# Altium PCB RX_Board.PcbDoc (part 2 of 5)
Units mm, origin at the board's own origin, x right, y up, seen from the top; angles counter-clockwise.
Board outline 69 x 69 mm, 4 copper layers (Top Layer, Int1 (GND), Int2 (GND), Bottom Layer), stack 1.586 mm thick; 118 components, 59 nets, 325 pads, 477 vias.
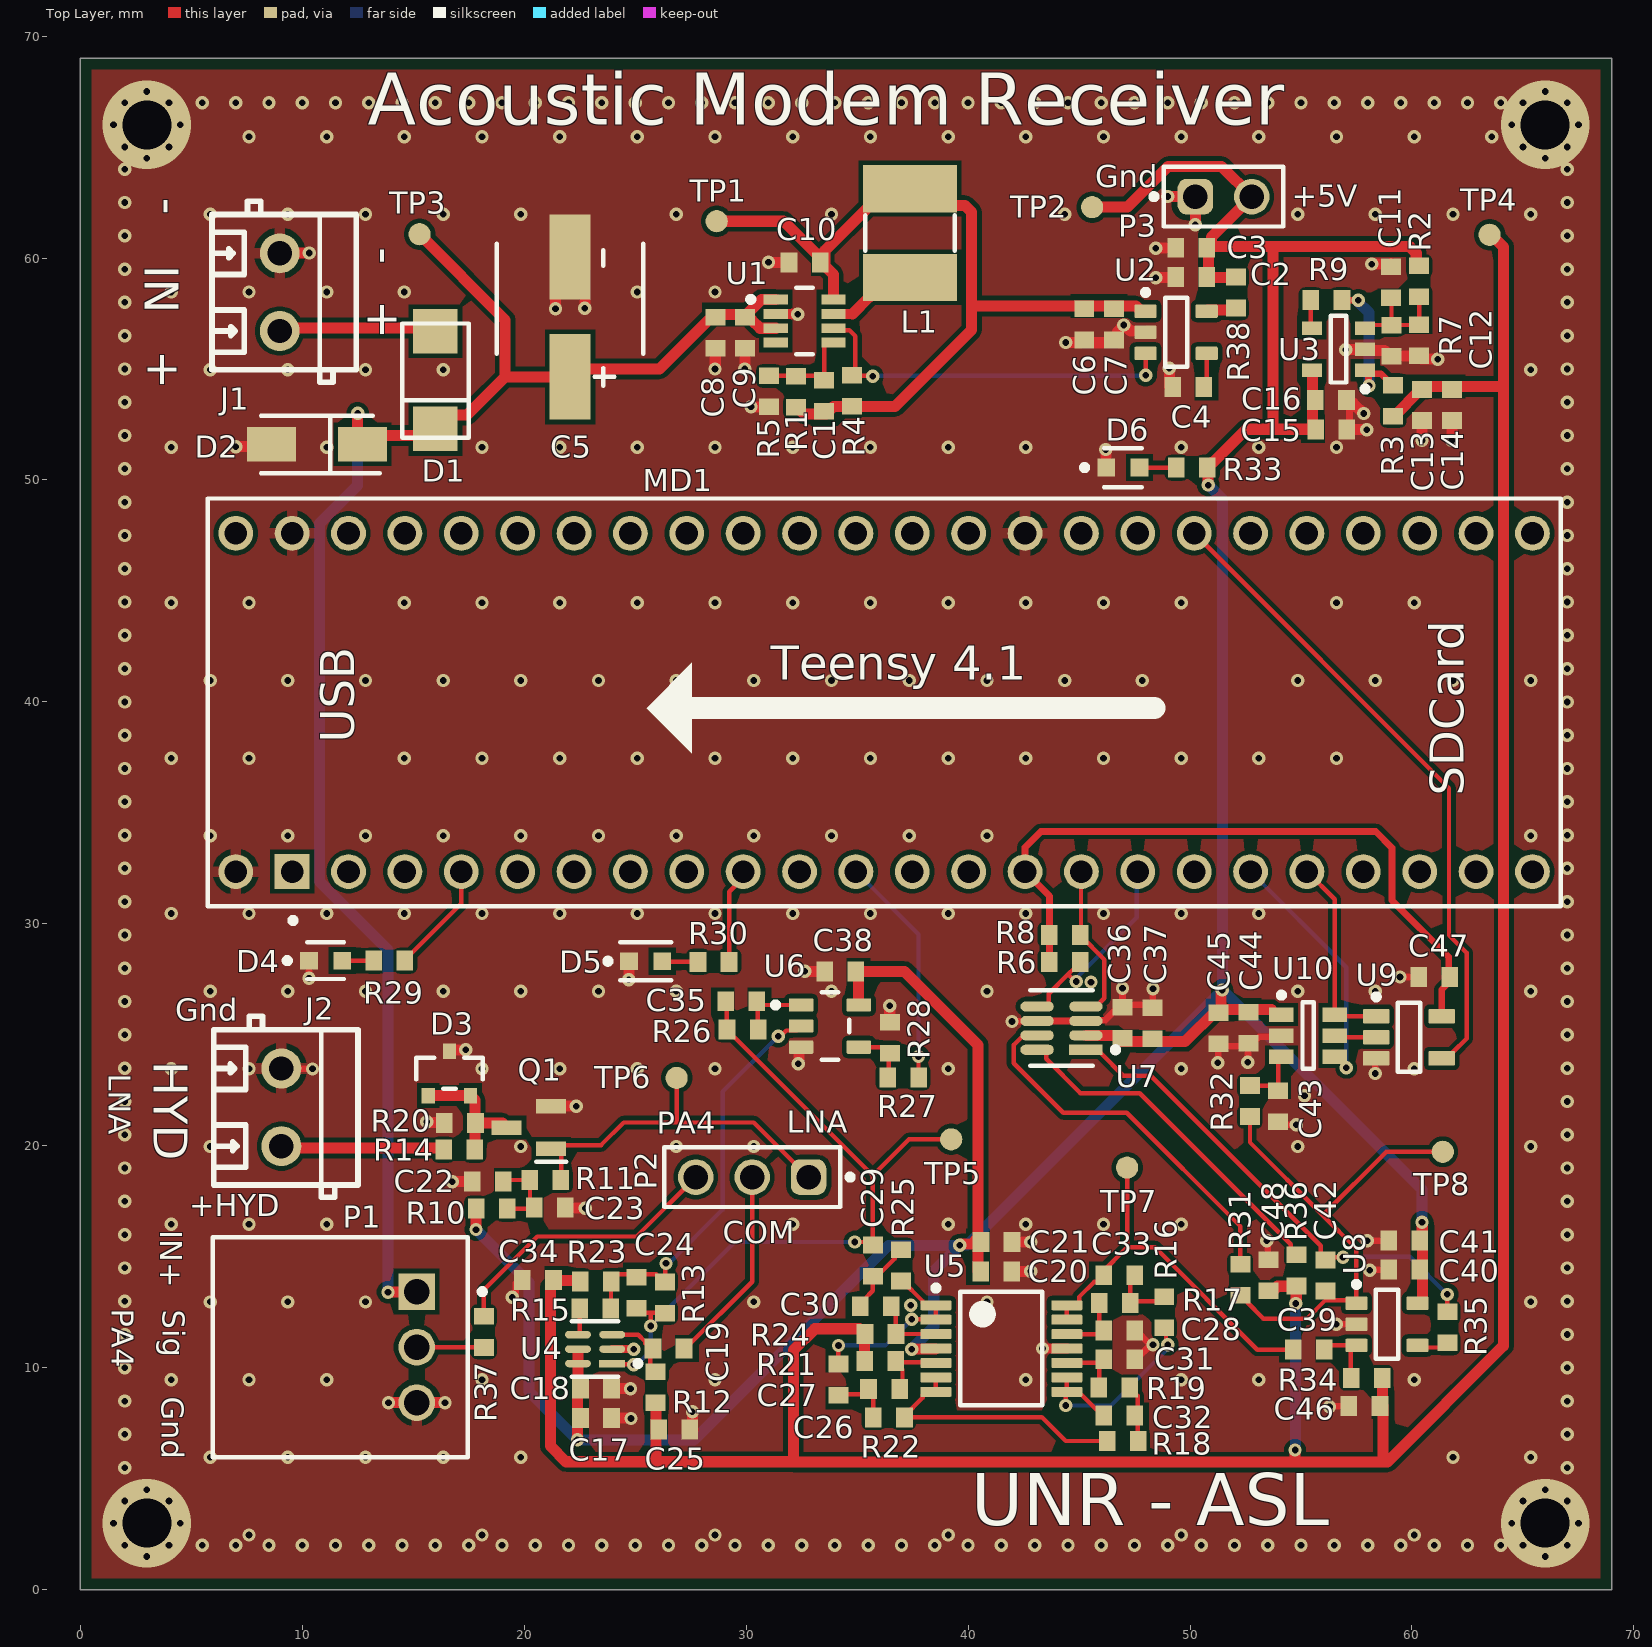
[diagram p0: Top Layer view]

## Part data (continued)
C24: library part CC0603CRNPO9BN6R8, "Surface Mount Ceramic Multilayer Capacitor 6.8pF 0.25pF C0G 50V 0603 Paper T/R", Case Code (Imperial)=0603, Case Code (Metric)=1608, Dielectric=C0G, Dielectric Material=Ceramic, JLCPCB Part Number=C282251, Manufacturer="Yageo Group", Max Operating Temperature=125°C, Min Operating Temperature=-55°C, Temperature Coefficient=30ppm/°C, Voltage=50V, Case/Package=0603, Category="Ceramic Capacitors", China RoHS=Compliant, ComponentLink1Description=https://datasheet.octopart.com:443/CC0603CRNPO9BN6R8-Yageo-datasheet-182140217.pdf?src-supplier=IHS, ComponentLink1URL=https://datasheet.octopart.com:443/CC0603CRNPO9BN6R8-Yageo-datasheet-182140217.pdf?src-supplier=IHS, ComponentLink2Description=https://datasheet.octopart.com:443/CC0603CRNPO9BN6R8-Yageo-datasheet-182029515.pdf?src-supplier=Farnell, ComponentLink2URL=https://datasheet.octopart.com:443/CC0603CRNPO9BN6R8-Yageo-datasheet-182029515.pdf?src-supplier=Farnell, ComponentLink3Description=https://datasheet.octopart.com:443/CC0603CRNPO9BN6R8-Yageo-datasheet-151948684.pdf?src-supplier=element14+APAC, ComponentLink3URL=https://datasheet.octopart.com:443/CC0603CRNPO9BN6R8-Yageo-datasheet-151948684.pdf?src-supplier=element14+APAC, ComponentLink4Description=https://datasheet.octopart.com:443/CC0603CRNPO9BN6R8-Yageo-Group-datasheet-189192896.pdf?src-supplier=TME, ComponentLink4URL=https://datasheet.octopart.com:443/CC0603CRNPO9BN6R8-Yageo-Group-datasheet-189192896.pdf?src-supplier=TME, ComponentLink5Description=https://datasheet.octopart.com:443/CC0603CRNPO9BN6R8-Yageo-Group-datasheet-188129580.pdf?src-supplier=LCSC, ComponentLink5URL=https://datasheet.octopart.com:443/CC0603CRNPO9BN6R8-Yageo-Group-datasheet-188129580.pdf?src-supplier=LCSC, ComponentLink6Description=https://datasheet.octopart.com:443/CC0603CRNPO9BN6R8-Yageo-datasheet-137875056.pdf?src-supplier=Future+Electronics, ComponentLink6URL=https://datasheet.octopart.com:443/CC0603CRNPO9BN6R8-Yageo-datasheet-137875056.pdf?src-supplier=Future+Electronics, ComponentLink7Description=https://datasheet.octopart.com:443/CC0603CRNPO9BN6R8-Yageo-datasheet-136957424.pdf?src-supplier=Future+Electronics, ComponentLink7URL=https://datasheet.octopart.com:443/CC0603CRNPO9BN6R8-Yageo-datasheet-136957424.pdf?src-supplier=Future+Electronics, ComponentLink8Description=https://datasheet.octopart.com:443/CC0603CRNPO9BN6R8-Yageo-datasheet-137700082.pdf?src-supplier=Future+Electronics, ComponentLink8URL=https://datasheet.octopart.com:443/CC0603CRNPO9BN6R8-Yageo-datasheet-137700082.pdf?src-supplier=Future+Electronics, ComponentLink9Description=https://datasheet.octopart.com:443/CC0603CRNPO9BN6R8-Yageo-datasheet-78855684.pdf?src-supplier=Future+Electronics, ComponentLink9URL=https://datasheet.octopart.com:443/CC0603CRNPO9BN6R8-Yageo-datasheet-78855684.pdf?src-supplier=Future+Electronics, ComponentLink10Description=https://datasheet.octopart.com:443/CC0603CRNPO9BN6R8-Yageo-datasheet-16730043.pdf?src-supplier=Future+Electronics, ComponentLink10URL=https://datasheet.octopart.com:443/CC0603CRNPO9BN6R8-Yageo-datasheet-16730043.pdf?src-supplier=Future+Electronics, ComponentLink11Description=https://datasheet.octopart.com:443/CC0603CRNPO9BN6R8-Yageo-datasheet-12589826.pdf?src-supplier=Future+Electronics, ComponentLink11URL=https://datasheet.octopart.com:443/CC0603CRNPO9BN6R8-Yageo-datasheet-12589826.pdf?src-supplier=Future+Electronics, ComponentLink12Description=https://datasheet.octopart.com:443/CC0603CRNPO9BN6R8-Yageo-datasheet-10406438.pdf?src-supplier=Future+Electronics, ComponentLink12URL=https://datasheet.octopart.com:443/CC0603CRNPO9BN6R8-Yageo-datasheet-10406438.pdf?src-supplier=Future+Electronics, ComponentLink13Description=https://datasheet.octopart.com:443/CC0603CRNPO9BN6R8-Yageo-datasheet-8817079.pdf?src-supplier=Future+Electronics, ComponentLink13URL=https://datasheet.octopart.com:443/CC0603CRNPO9BN6R8-Yageo-datasheet-8817079.pdf?src-supplier=Future+Electronics, ComponentLink14Description=https://datasheet.octopart.com:443/CC0603CRNPO9BN6R8-Yageo-datasheet-8324240.pdf?src-supplier=Future+Electronics, ComponentLink14URL=https://datasheet.octopart.com:443/CC0603CRNPO9BN6R8-Yageo-datasheet-8324240.pdf?src-supplier=Future+Electronics, ComponentLink15Description=https://datasheet.octopart.com:443/CC0603CRNPO9BN6R8-Yageo-datasheet-504625.pdf?src-supplier=Future+Electronics, ComponentLink15URL=https://datasheet.octopart.com:443/CC0603CRNPO9BN6R8-Yageo-datasheet-504625.pdf?src-supplier=Future+Electronics, ComponentLink16Description=https://datasheet.octopart.com:443/CC0603CRNPO9BN6R8-Yageo-datasheet-5321569.pdf?src-supplier=Future+Electronics, ComponentLink16URL=https://datasheet.octopart.com:443/CC0603CRNPO9BN6R8-Yageo-datasheet-5321569.pdf?src-supplier=Future+Electronics, ComponentLink17Description=https://datasheet.octopart.com:443/CC0603CRNPO9BN6R8-Yageo-datasheet-8643175.pdf?src-supplier=SOS+electronic, ComponentLink17URL=https://datasheet.octopart.com:443/CC0603CRNPO9BN6R8-Yageo-datasheet-8643175.pdf?src-supplier=SOS+electronic, ComponentLink18Description=http://sigma.octopart.com:80/conflict_mineral_statement/Yageo-company-3.pdf?src-supplier=Compliance+Statements, ComponentLink18URL=http://sigma.octopart.com:80/conflict_mineral_statement/Yageo-company-3.pdf?src-supplier=Compliance+Statements, ComponentLink19Description=http://sigma.octopart.com:80/rohs_statement/Yageo-company-2.pdf?src-supplier=Compliance+Statements, ComponentLink19URL=http://sigma.octopart.com:80/rohs_statement/Yageo-company-2.pdf?src-supplier=Compliance+Statements, Composition=Ceramic, Country of Origin="Mainland China, Taiwan", Depth=800µm, Export Control Classification Number (ECCN) Code=EAR99, Halogen Free="Halogen Free", Harmonized Tariff Schedule (HTS) Code=8532.24.00.20, Height=800µm, Introduction Date=2003-08-13, Lead Free="Lead Free", Length=1.6mm, Lifecycle Status=Production, Manufacturer Part Number=CC0603CRNPO9BN6R8, Mounting Technology="Surface Mount", Number of Terminals=2, Packaging="Tape and Reel", Pricing="10=0.041, 20=0.04, 30=0.038, 50=0.037, 100=0.035, 250=0.031, 500=0.026, 1000=0.025 (USD)", Radiation Hardening=No, REACH SVHC=Unaffected, RoHS=Compliant, Schedule B="8532240020, 8532240020|8532240020|8532240020|8532240020|8532240020", Stock=9772, Supplier=Newark, Supplier Part Number=CC0603CRNPO9BN6R8, Termination=SMD/SMT, Thickness=889µm, Voltage Rating=50V, Voltage Rating (DC)=50V, Weight=2.012816mg, Width=800µm
C26 C27 C29 C30 C31: library part CC0603JRNPO9BN102, "50V 1nF NP0 ±5% 0603 Multilayer Ceramic Capacitors MLCC - SMD/SMT ROHS", Case Code (Imperial)=0603, Case Code (Metric)=1608, Dielectric=C0G, Dielectric Material=Ceramic, JLCPCB Part Number=C106246, Manufacturer="Yageo Group", Max Operating Temperature=125°C, Min Operating Temperature=-55°C, Temperature Coefficient=30ppm/°C, Tolerance=5%, Voltage=50V, Case/Package=0603, Category="Ceramic Capacitors", China RoHS=Compliant, ComponentLink1Description=https://datasheet.octopart.com:443/CC0603JRNPO9BN102-Yageo-datasheet-182140217.pdf?src-supplier=IHS, ComponentLink1URL=https://datasheet.octopart.com:443/CC0603JRNPO9BN102-Yageo-datasheet-182140217.pdf?src-supplier=IHS, ComponentLink2Description=https://datasheet.octopart.com:443/CC0603JRNPO9BN102-Yageo-datasheet-137875056.pdf?src-supplier=Future+Electronics, ComponentLink2URL=https://datasheet.octopart.com:443/CC0603JRNPO9BN102-Yageo-datasheet-137875056.pdf?src-supplier=Future+Electronics, ComponentLink3Description=https://datasheet.octopart.com:443/CC0603JRNPO9BN102-Yageo-datasheet-136957424.pdf?src-supplier=Future+Electronics, ComponentLink3URL=https://datasheet.octopart.com:443/CC0603JRNPO9BN102-Yageo-datasheet-136957424.pdf?src-supplier=Future+Electronics, ComponentLink4Description=https://datasheet.octopart.com:443/CC0603JRNPO9BN102-Yageo-datasheet-137700082.pdf?src-supplier=Future+Electronics, ComponentLink4URL=https://datasheet.octopart.com:443/CC0603JRNPO9BN102-Yageo-datasheet-137700082.pdf?src-supplier=Future+Electronics, ComponentLink5Description=https://datasheet.octopart.com:443/CC0603JRNPO9BN102-Yageo-datasheet-78855684.pdf?src-supplier=Future+Electronics, ComponentLink5URL=https://datasheet.octopart.com:443/CC0603JRNPO9BN102-Yageo-datasheet-78855684.pdf?src-supplier=Future+Electronics, ComponentLink6Description=https://datasheet.octopart.com:443/CC0603JRNPO9BN102-Yageo-datasheet-16730043.pdf?src-supplier=Future+Electronics, ComponentLink6URL=https://datasheet.octopart.com:443/CC0603JRNPO9BN102-Yageo-datasheet-16730043.pdf?src-supplier=Future+Electronics, ComponentLink7Description=https://datasheet.octopart.com:443/CC0603JRNPO9BN102-Yageo-datasheet-12589826.pdf?src-supplier=Future+Electronics, ComponentLink7URL=https://datasheet.octopart.com:443/CC0603JRNPO9BN102-Yageo-datasheet-12589826.pdf?src-supplier=Future+Electronics, ComponentLink8Description=https://sigma.octopart.com:443/147830939/technical_drawing/Yageo-CC0603JRNPO9BN102.pdf?src-supplier=Upverter, ComponentLink8URL=https://sigma.octopart.com:443/147830939/technical_drawing/Yageo-CC0603JRNPO9BN102.pdf?src-supplier=Upverter, ComponentLink9Description=https://datasheet.octopart.com:443/CC0603JRNPO9BN102-Yageo-datasheet-10406438.pdf?src-supplier=element14+APAC, ComponentLink9URL=https://datasheet.octopart.com:443/CC0603JRNPO9BN102-Yageo-datasheet-10406438.pdf?src-supplier=element14+APAC, ComponentLink10Description=https://datasheet.octopart.com:443/CC0603JRNPO9BN102-Yageo-datasheet-67645495.pdf?src-supplier=element14+APAC, ComponentLink10URL=https://datasheet.octopart.com:443/CC0603JRNPO9BN102-Yageo-datasheet-67645495.pdf?src-supplier=element14+APAC, ComponentLink11Description=https://datasheet.octopart.com:443/CC0603JRNPO9BN102-Yageo-datasheet-10882999.pdf?src-supplier=element14+APAC, ComponentLink11URL=https://datasheet.octopart.com:443/CC0603JRNPO9BN102-Yageo-datasheet-10882999.pdf?src-supplier=element14+APAC, ComponentLink12Description=https://datasheet.octopart.com:443/CC0603JRNPO9BN102-Yageo-datasheet-151948684.pdf?src-supplier=Newark, ComponentLink12URL=https://datasheet.octopart.com:443/CC0603JRNPO9BN102-Yageo-datasheet-151948684.pdf?src-supplier=Newark, ComponentLink13Description=https://datasheet.octopart.com:443/CC0603JRNPO9BN102-Yageo-datasheet-181968167.pdf?src-supplier=Newark, ComponentLink13URL=https://datasheet.octopart.com:443/CC0603JRNPO9BN102-Yageo-datasheet-181968167.pdf?src-supplier=Newark, ComponentLink14Description=https://datasheet.octopart.com:443/CC0603JRNPO9BN102-Yageo-datasheet-181968166.pdf?src-supplier=Newark, ComponentLink14URL=https://datasheet.octopart.com:443/CC0603JRNPO9BN102-Yageo-datasheet-181968166.pdf?src-supplier=Newark, ComponentLink15Description=https://datasheet.octopart.com:443/CC0603JRNPO9BN102-Yageo-datasheet-65873193.pdf?src-supplier=Farnell, ComponentLink15URL=https://datasheet.octopart.com:443/CC0603JRNPO9BN102-Yageo-datasheet-65873193.pdf?src-supplier=Farnell, ComponentLink16Description=https://datasheet.octopart.com:443/CC0603JRNPO9BN102-Yageo-datasheet-8817079.pdf?src-supplier=element14, ComponentLink16URL=https://datasheet.octopart.com:443/CC0603JRNPO9BN102-Yageo-datasheet-8817079.pdf?src-supplier=element14, ComponentLink17Description=https://datasheet.octopart.com:443/CC0603JRNPO9BN102-Yageo-datasheet-8324240.pdf?src-supplier=element14, ComponentLink17URL=https://datasheet.octopart.com:443/CC0603JRNPO9BN102-Yageo-datasheet-8324240.pdf?src-supplier=element14, ComponentLink18Description=https://datasheet.octopart.com:443/CC0603JRNPO9BN102-Yageo-datasheet-504625.pdf?src-supplier=element14, ComponentLink18URL=https://datasheet.octopart.com:443/CC0603JRNPO9BN102-Yageo-datasheet-504625.pdf?src-supplier=element14, ComponentLink19Description=https://datasheet.octopart.com:443/CC0603JRNPO9BN102-Yageo-datasheet-5321569.pdf?src-supplier=element14, ComponentLink19URL=https://datasheet.octopart.com:443/CC0603JRNPO9BN102-Yageo-datasheet-5321569.pdf?src-supplier=element14, ComponentLink20Description=https://datasheet.octopart.com:443/CC0603JRNPO9BN102-Yageo-Group-datasheet-188129580.pdf?src-supplier=LCSC, ComponentLink20URL=https://datasheet.octopart.com:443/CC0603JRNPO9BN102-Yageo-Group-datasheet-188129580.pdf?src-supplier=LCSC, ComponentLink21Description=https://datasheet.octopart.com:443/CC0603JRNPO9BN102-Yageo-datasheet-8555986.pdf?src-supplier=TME, ComponentLink21URL=https://datasheet.octopart.com:443/CC0603JRNPO9BN102-Yageo-datasheet-8555986.pdf?src-supplier=TME, ComponentLink22Description=https://datasheet.octopart.com:443/CC0603JRNPO9BN102-Yageo-datasheet-68296204.pdf?src-supplier=Megastar, ComponentLink22URL=https://datasheet.octopart.com:443/CC0603JRNPO9BN102-Yageo-datasheet-68296204.pdf?src-supplier=Megastar, ComponentLink23Description=http://sigma.octopart.com:80/conflict_mineral_statement/Yageo-company-3.pdf?src-supplier=Compliance+Statements, ComponentLink23URL=http://sigma.octopart.com:80/conflict_mineral_statement/Yageo-company-3.pdf?src-supplier=Compliance+Statements, ComponentLink24Description=http://sigma.octopart.com:80/rohs_statement/Yageo-company-2.pdf?src-supplier=Compliance+Statements, ComponentLink24URL=http://sigma.octopart.com:80/rohs_statement/Yageo-company-2.pdf?src-supplier=Compliance+Statements, Composition=Ceramic, Country of Origin="Mainland China, Taiwan", Depth=800µm, Export Control Classification Number (ECCN) Code=EAR99, Halogen Free="Halogen Free", Harmonized Tariff Schedule (HTS) Code=8532.24.00.20, Height=800µm, Introduction Date=2009-04-16, Lead Free="Lead Free", Length=1.6mm, Lifecycle Status=Production, Manufacturer Part Number=CC0603JRNPO9BN102, Material=Ceramic, Mounting Technology="Surface Mount", Number of Terminals=2, Packaging=Digi-Reel®, Pins=2, Pricing="4000=0.02, 12000=0.019, 20000=0.018 (USD)", Radiation Hardening=No, REACH SVHC=Unaffected, RoHS=Compliant, Schedule B="8532240020, 8532240020|8532240020, 8532240020|8532240020|8532240020, 8532240020|8532240020|8532240020|8532240020", Stock=4000, Supplier=Avnet, Supplier Part Number=CC0603JRNPO9BN102, Termination=SMD/SMT, Thickness=889µm, Voltage Rating=50V, Voltage Rating (DC)=50V, Width=800µm
C28: library part CC0603FRNPO9BN471, "50V 470pF NP0 ±1% 0603 Multilayer Ceramic Capacitors MLCC - SMD/SMT ROHS", Case Code (Imperial)=0603, Case Code (Metric)=1608, Dielectric=C0G, Dielectric Material=Ceramic, Insulation Resistance=10GΩ, JLCPCB Part Number=C519564, Manufacturer="Yageo Group", Max Operating Temperature=125°C, Min Operating Temperature=-55°C, Tolerance=1%, Voltage Rating=50V, Case/Package=0603, Category="Ceramic Capacitors", China RoHS=Compliant, ComponentLink1Description=https://datasheet.octopart.com:443/CC0603FRNPO9BN471-Yageo-datasheet-182140217.pdf?src-supplier=IHS, ComponentLink1URL=https://datasheet.octopart.com:443/CC0603FRNPO9BN471-Yageo-datasheet-182140217.pdf?src-supplier=IHS, ComponentLink2Description=https://datasheet.octopart.com:443/CC0603FRNPO9BN471-Yageo-datasheet-151948684.pdf?src-supplier=HQonline, ComponentLink2URL=https://datasheet.octopart.com:443/CC0603FRNPO9BN471-Yageo-datasheet-151948684.pdf?src-supplier=HQonline, ComponentLink3Description=https://datasheet.octopart.com:443/CC0603FRNPO9BN471-Yageo-datasheet-182029577.pdf?src-supplier=Newark, ComponentLink3URL=https://datasheet.octopart.com:443/CC0603FRNPO9BN471-Yageo-datasheet-182029577.pdf?src-supplier=Newark, ComponentLink4Description=https://datasheet.octopart.com:443/CC0603FRNPO9BN471-Yageo-datasheet-182029576.pdf?src-supplier=Newark, ComponentLink4URL=https://datasheet.octopart.com:443/CC0603FRNPO9BN471-Yageo-datasheet-182029576.pdf?src-supplier=Newark, ComponentLink5Description=https://datasheet.octopart.com:443/CC0603FRNPO9BN471-Yageo-Group-datasheet-188129580.pdf?src-supplier=LCSC, ComponentLink5URL=https://datasheet.octopart.com:443/CC0603FRNPO9BN471-Yageo-Group-datasheet-188129580.pdf?src-supplier=LCSC, ComponentLink6Description=https://datasheet.octopart.com:443/CC0603FRNPO9BN471-Yageo-datasheet-137875056.pdf?src-supplier=Future+Electronics, ComponentLink6URL=https://datasheet.octopart.com:443/CC0603FRNPO9BN471-Yageo-datasheet-137875056.pdf?src-supplier=Future+Electronics, ComponentLink7Description=https://datasheet.octopart.com:443/CC0603FRNPO9BN471-Yageo-datasheet-136957424.pdf?src-supplier=Future+Electronics, ComponentLink7URL=https://datasheet.octopart.com:443/CC0603FRNPO9BN471-Yageo-datasheet-136957424.pdf?src-supplier=Future+Electronics, ComponentLink8Description=https://datasheet.octopart.com:443/CC0603FRNPO9BN471-Yageo-datasheet-137700082.pdf?src-supplier=Future+Electronics, ComponentLink8URL=https://datasheet.octopart.com:443/CC0603FRNPO9BN471-Yageo-datasheet-137700082.pdf?src-supplier=Future+Electronics, ComponentLink9Description=https://datasheet.octopart.com:443/CC0603FRNPO9BN471-Yageo-datasheet-78855684.pdf?src-supplier=Future+Electronics, ComponentLink9URL=https://datasheet.octopart.com:443/CC0603FRNPO9BN471-Yageo-datasheet-78855684.pdf?src-supplier=Future+Electronics, ComponentLink10Description=https://datasheet.octopart.com:443/CC0603FRNPO9BN471-Yageo-datasheet-16730043.pdf?src-supplier=Future+Electronics, ComponentLink10URL=https://datasheet.octopart.com:443/CC0603FRNPO9BN471-Yageo-datasheet-16730043.pdf?src-supplier=Future+Electronics, ComponentLink11Description=https://datasheet.octopart.com:443/CC0603FRNPO9BN471-Yageo-datasheet-15895757.pdf?src-supplier=Future+Electronics, ComponentLink11URL=https://datasheet.octopart.com:443/CC0603FRNPO9BN471-Yageo-datasheet-15895757.pdf?src-supplier=Future+Electronics, ComponentLink12Description=https://datasheet.octopart.com:443/CC0603FRNPO9BN471-Yageo-datasheet-12589826.pdf?src-supplier=Future+Electronics, ComponentLink12URL=https://datasheet.octopart.com:443/CC0603FRNPO9BN471-Yageo-datasheet-12589826.pdf?src-supplier=Future+Electronics, ComponentLink13Description=https://datasheet.octopart.com:443/CC0603FRNPO9BN471-Yageo-datasheet-10406438.pdf?src-supplier=Future+Electronics, ComponentLink13URL=https://datasheet.octopart.com:443/CC0603FRNPO9BN471-Yageo-datasheet-10406438.pdf?src-supplier=Future+Electronics, ComponentLink14Description=http://sigma.octopart.com:80/conflict_mineral_statement/Yageo-company-3.pdf?src-supplier=Compliance+Statements, ComponentLink14URL=http://sigma.octopart.com:80/conflict_mineral_statement/Yageo-company-3.pdf?src-supplier=Compliance+Statements, ComponentLink15Description=http://sigma.octopart.com:80/rohs_statement/Yageo-company-2.pdf?src-supplier=Compliance+Statements, ComponentLink15URL=http://sigma.octopart.com:80/rohs_statement/Yageo-company-2.pdf?src-supplier=Compliance+Statements, Composition=Ceramic, Depth=800µm, Dissipation Factor=0.1%, Halogen Free="Halogen Free", Height=800µm, Lead Free="Lead Free", Length=1.6mm, Lifecycle Status=Production, Manufacturer Part Number=CC0603FRNPO9BN471, Mounting Technology="Surface Mount", Number of Terminals=2, Packaging="Tape and Reel", Pricing="1=0.0986, 11=0.0703, 101=0.0582, 501=0.0554, 1001=0.0547 (USD)", Radiation Hardening=No, REACH SVHC=Unaffected, RoHS=Compliant, Schedule B="8532240020, 8532240020|8532240020, 8532240020|8532240020|8532240020, 8532240020|8532240020|8532240020|8532240020", Stock=7080, Supplier=Newark, Supplier Part Number=CC0603FRNPO9BN471, Termination=SMD/SMT, Thickness=889µm, Voltage Rating (DC)=50V, Width=800µm
C32: library part CC0603JRNPO9BN122, "50V 1.2nF NP0 ±5% 0603 Multilayer Ceramic Capacitors MLCC - SMD/SMT ROHS", Case/Package=0603, Dielectric Material=Ceramic, JLCPCB Part Number=C576816, Manufacturer="Yageo Group", Max Operating Temperature=125°C, Min Operating Temperature=-55°C, Tolerance=5%, Voltage Rating=50V, Category="Ceramic Capacitors", China RoHS=Compliant, ComponentLink1Description=https://datasheet.octopart.com:443/CC0603JRNPO9BN122-Yageo-datasheet-182140217.pdf?src-supplier=IHS, ComponentLink1URL=https://datasheet.octopart.com:443/CC0603JRNPO9BN122-Yageo-datasheet-182140217.pdf?src-supplier=IHS, ComponentLink2Description=https://datasheet.octopart.com:443/CC0603JRNPO9BN122-Yageo-datasheet-182029623.pdf?src-supplier=Farnell, ComponentLink2URL=https://datasheet.octopart.com:443/CC0603JRNPO9BN122-Yageo-datasheet-182029623.pdf?src-supplier=Farnell, ComponentLink3Description=https://datasheet.octopart.com:443/CC0603JRNPO9BN122-Yageo-Group-datasheet-188129580.pdf?src-supplier=LCSC, ComponentLink3URL=https://datasheet.octopart.com:443/CC0603JRNPO9BN122-Yageo-Group-datasheet-188129580.pdf?src-supplier=LCSC, ComponentLink4Description=https://datasheet.octopart.com:443/CC0603JRNPO9BN122-Yageo-datasheet-137875056.pdf?src-supplier=Future+Electronics, ComponentLink4URL=https://datasheet.octopart.com:443/CC0603JRNPO9BN122-Yageo-datasheet-137875056.pdf?src-supplier=Future+Electronics, ComponentLink5Description=https://datasheet.octopart.com:443/CC0603JRNPO9BN122-Yageo-datasheet-136957424.pdf?src-supplier=Future+Electronics, ComponentLink5URL=https://datasheet.octopart.com:443/CC0603JRNPO9BN122-Yageo-datasheet-136957424.pdf?src-supplier=Future+Electronics, ComponentLink6Description=https://datasheet.octopart.com:443/CC0603JRNPO9BN122-Yageo-datasheet-137700082.pdf?src-supplier=Future+Electronics, ComponentLink6URL=https://datasheet.octopart.com:443/CC0603JRNPO9BN122-Yageo-datasheet-137700082.pdf?src-supplier=Future+Electronics, ComponentLink7Description=https://datasheet.octopart.com:443/CC0603JRNPO9BN122-Yageo-datasheet-78855684.pdf?src-supplier=Future+Electronics, ComponentLink7URL=https://datasheet.octopart.com:443/CC0603JRNPO9BN122-Yageo-datasheet-78855684.pdf?src-supplier=Future+Electronics, ComponentLink8Description=https://datasheet.octopart.com:443/CC0603JRNPO9BN122-Yageo-datasheet-62126864.pdf?src-supplier=Future+Electronics, ComponentLink8URL=https://datasheet.octopart.com:443/CC0603JRNPO9BN122-Yageo-datasheet-62126864.pdf?src-supplier=Future+Electronics, ComponentLink9Description=https://datasheet.octopart.com:443/CC0603JRNPO9BN122-Yageo-datasheet-62091628.pdf?src-supplier=Future+Electronics, ComponentLink9URL=https://datasheet.octopart.com:443/CC0603JRNPO9BN122-Yageo-datasheet-62091628.pdf?src-supplier=Future+Electronics, ComponentLink10Description=https://datasheet.octopart.com:443/CC0603JRNPO9BN122-Yageo-datasheet-24578986.pdf?src-supplier=Future+Electronics, ComponentLink10URL=https://datasheet.octopart.com:443/CC0603JRNPO9BN122-Yageo-datasheet-24578986.pdf?src-supplier=Future+Electronics, ComponentLink11Description=https://datasheet.octopart.com:443/CC0603JRNPO9BN122-Yageo-datasheet-10406438.pdf?src-supplier=Future+Electronics, ComponentLink11URL=https://datasheet.octopart.com:443/CC0603JRNPO9BN122-Yageo-datasheet-10406438.pdf?src-supplier=Future+Electronics, ComponentLink12Description=http://sigma.octopart.com:80/conflict_mineral_statement/Yageo-company-3.pdf?src-supplier=Compliance+Statements, ComponentLink12URL=http://sigma.octopart.com:80/conflict_mineral_statement/Yageo-company-3.pdf?src-supplier=Compliance+Statements, ComponentLink13Description=http://sigma.octopart.com:80/rohs_statement/Yageo-company-2.pdf?src-supplier=Compliance+Statements, ComponentLink13URL=http://sigma.octopart.com:80/rohs_statement/Yageo-company-2.pdf?src-supplier=Compliance+Statements, Halogen Free="Halogen Free", Height=800µm, Lead Free="Lead Free", Length=1.6mm, Lifecycle Status=Production, Manufacturer Part Number=CC0603JRNPO9BN122, Mounting Technology="Surface Mount", Number of Terminals=2, Packaging="Tape & Reel (TR)", Pricing="10=0.09, 20=0.088, 30=0.085, 50=0.083, 100=0.08, 250=0.079, 500=0.078, 1000=0.057 (USD)", REACH SVHC=Unaffected, RoHS=Compliant, Stock=4890, Supplier=Newark, Supplier Part Number=CC0603JRNPO9BN122, Thickness=889µm, Voltage Rating (DC)=50V, Width=800µm
C33 C43: library part CC0603JRNPO9BN332, "50V 3.3nF NP0 ±5% 0603 Multilayer Ceramic Capacitors MLCC - SMD/SMT ROHS", Case Code (Imperial)=0603, Case Code (Metric)=1608, Dielectric=C0G, Dielectric Material=Ceramic, JLCPCB Part Number=C107048, Manufacturer="Yageo Group", Max Operating Temperature=125°C, Min Operating Temperature=-55°C, Tolerance=5%, Voltage Rating=50V, Case/Package=0603, Category="Ceramic Capacitors", China RoHS=Compliant, ComponentLink1Description=https://datasheet.octopart.com:443/CC0603JRNPO9BN332-Yageo-datasheet-182140217.pdf?src-supplier=IHS, ComponentLink1URL=https://datasheet.octopart.com:443/CC0603JRNPO9BN332-Yageo-datasheet-182140217.pdf?src-supplier=IHS, ComponentLink2Description=https://datasheet.octopart.com:443/CC0603JRNPO9BN332-Yageo-datasheet-182029633.pdf?src-supplier=Newark, ComponentLink2URL=https://datasheet.octopart.com:443/CC0603JRNPO9BN332-Yageo-datasheet-182029633.pdf?src-supplier=Newark, ComponentLink3Description=https://datasheet.octopart.com:443/CC0603JRNPO9BN332-Yageo-datasheet-151948684.pdf?src-supplier=element14+APAC, ComponentLink3URL=https://datasheet.octopart.com:443/CC0603JRNPO9BN332-Yageo-datasheet-151948684.pdf?src-supplier=element14+APAC, ComponentLink4Description=https://datasheet.octopart.com:443/CC0603JRNPO9BN332-Yageo-datasheet-137875056.pdf?src-supplier=Future+Electronics, ComponentLink4URL=https://datasheet.octopart.com:443/CC0603JRNPO9BN332-Yageo-datasheet-137875056.pdf?src-supplier=Future+Electronics, ComponentLink5Description=https://datasheet.octopart.com:443/CC0603JRNPO9BN332-Yageo-datasheet-137700082.pdf?src-supplier=Future+Electronics, ComponentLink5URL=https://datasheet.octopart.com:443/CC0603JRNPO9BN332-Yageo-datasheet-137700082.pdf?src-supplier=Future+Electronics, ComponentLink6Description=http://sigma.octopart.com:80/conflict_mineral_statement/Yageo-company-3.pdf?src-supplier=Compliance+Statements, ComponentLink6URL=http://sigma.octopart.com:80/conflict_mineral_statement/Yageo-company-3.pdf?src-supplier=Compliance+Statements, ComponentLink7Description=http://sigma.octopart.com:80/rohs_statement/Yageo-company-2.pdf?src-supplier=Compliance+Statements, ComponentLink7URL=http://sigma.octopart.com:80/rohs_statement/Yageo-company-2.pdf?src-supplier=Compliance+Statements, Composition=Ceramic, Country of Origin="Mainland China, Taiwan", Export Control Classification Number (ECCN) Code=EAR99, Halogen Free="Halogen Free", Harmonized Tariff Schedule (HTS) Code=8532.24.00.20, Height=800µm, Introduction Date=2014-02-18, Lead Free="Lead Free", Length=1.6mm, Lifecycle Status=Production, Manufacturer Part Number=CC0603JRNPO9BN332, Mounting Technology="Surface Mount", Number of Terminals=2, Pricing="10=0.116, 20=0.113, 30=0.11, 50=0.106, 100=0.103, 250=0.092, 500=0.08, 1000=0.073 (USD)", REACH SVHC=Unaffected, RoHS=Compliant, Schedule B="8532240020, 8532240020|8532240020|8532240020|8532240020|8532240020", Stock=69, Supplier=Newark, Supplier Part Number=CC0603JRNPO9BN332, Termination=SMD/SMT, Thickness=889µm, Voltage Rating (DC)=50V, Weight=2.012816mg, Width=800µm
C35 C42: library part CC0603JRNPO9BN680, "Multilayer Ceramic Capacitor, 68 pF, 50 V, ± 5%, C0G (NP0), 0603 [1608 Metric]", Case Code (Imperial)=0603, Dielectric=C0G, Dielectric Material=Ceramic, JLCPCB Part Number=C62782, Manufacturer="Yageo Group", Max Operating Temperature=125°C, Min Operating Temperature=-55°C, Temperature Coefficient=30ppm/°C, Tolerance=5%, Voltage=50V, Case/Package=0603, Category="Ceramic Capacitors", China RoHS=Compliant, ComponentLink1Description=https://datasheet.octopart.com:443/CC0603JRNPO9BN680-Yageo-datasheet-182140217.pdf?src-supplier=IHS, ComponentLink1URL=https://datasheet.octopart.com:443/CC0603JRNPO9BN680-Yageo-datasheet-182140217.pdf?src-supplier=IHS, ComponentLink2Description=https://datasheet.octopart.com:443/CC0603JRNPO9BN680-Yageo-datasheet-78855684.pdf?src-supplier=Upverter, ComponentLink2URL=https://datasheet.octopart.com:443/CC0603JRNPO9BN680-Yageo-datasheet-78855684.pdf?src-supplier=Upverter, ComponentLink3Description=https://datasheet.octopart.com:443/CC0603JRNPO9BN680-Yageo-datasheet-10406438.pdf?src-supplier=element14+APAC, ComponentLink3URL=https://datasheet.octopart.com:443/CC0603JRNPO9BN680-Yageo-datasheet-10406438.pdf?src-supplier=element14+APAC, ComponentLink4Description=https://datasheet.octopart.com:443/CC0603JRNPO9BN680-Yageo-datasheet-65873193.pdf?src-supplier=element14+APAC, ComponentLink4URL=https://datasheet.octopart.com:443/CC0603JRNPO9BN680-Yageo-datasheet-65873193.pdf?src-supplier=element14+APAC, ComponentLink5Description=https://datasheet.octopart.com:443/CC0603JRNPO9BN680-Phycomp-datasheet-5321569.pdf?src-supplier=Newark, ComponentLink5URL=https://datasheet.octopart.com:443/CC0603JRNPO9BN680-Phycomp-datasheet-5321569.pdf?src-supplier=Newark, ComponentLink6Description=https://datasheet.octopart.com:443/CC0603JRNPO9BN680-Yageo-datasheet-151948684.pdf?src-supplier=Newark, ComponentLink6URL=https://datasheet.octopart.com:443/CC0603JRNPO9BN680-Yageo-datasheet-151948684.pdf?src-supplier=Newark, ComponentLink7Description=https://datasheet.octopart.com:443/CC0603JRNPO9BN680-Yageo-datasheet-67645495.pdf?src-supplier=Newark, ComponentLink7URL=https://datasheet.octopart.com:443/CC0603JRNPO9BN680-Yageo-datasheet-67645495.pdf?src-supplier=Newark, ComponentLink8Description=https://datasheet.octopart.com:443/CC0603JRNPO9BN680-Yageo-datasheet-181968266.pdf?src-supplier=Farnell, ComponentLink8URL=https://datasheet.octopart.com:443/CC0603JRNPO9BN680-Yageo-datasheet-181968266.pdf?src-supplier=Farnell, ComponentLink9Description=https://datasheet.octopart.com:443/CC0603JRNPO9BN680-Yageo-datasheet-181968263.pdf?src-supplier=Farnell, ComponentLink9URL=https://datasheet.octopart.com:443/CC0603JRNPO9BN680-Yageo-datasheet-181968263.pdf?src-supplier=Farnell, ComponentLink10Description=https://datasheet.octopart.com:443/CC0603JRNPO9BN680-Yageo-datasheet-10882999.pdf?src-supplier=Farnell, ComponentLink10URL=https://datasheet.octopart.com:443/CC0603JRNPO9BN680-Yageo-datasheet-10882999.pdf?src-supplier=Farnell, ComponentLink11Description=https://datasheet.octopart.com:443/CC0603JRNPO9BN680-Yageo-datasheet-10621397.pdf?src-supplier=Farnell, ComponentLink11URL=https://datasheet.octopart.com:443/CC0603JRNPO9BN680-Yageo-datasheet-10621397.pdf?src-supplier=Farnell, ComponentLink12Description=https://datasheet.octopart.com:443/CC0603JRNPO9BN680-Yageo-datasheet-8817079.pdf?src-supplier=element14, ComponentLink12URL=https://datasheet.octopart.com:443/CC0603JRNPO9BN680-Yageo-datasheet-8817079.pdf?src-supplier=element14, ComponentLink13Description=https://datasheet.octopart.com:443/CC0603JRNPO9BN680-Yageo-datasheet-8324240.pdf?src-supplier=element14, ComponentLink13URL=https://datasheet.octopart.com:443/CC0603JRNPO9BN680-Yageo-datasheet-8324240.pdf?src-supplier=element14, ComponentLink14Description=https://datasheet.octopart.com:443/CC0603JRNPO9BN680-Yageo-datasheet-504625.pdf?src-supplier=element14, ComponentLink14URL=https://datasheet.octopart.com:443/CC0603JRNPO9BN680-Yageo-datasheet-504625.pdf?src-supplier=element14, ComponentLink15Description=https://datasheet.octopart.com:443/CC0603JRNPO9BN680-Yageo-Group-datasheet-188129580.pdf?src-supplier=LCSC, ComponentLink15URL=https://datasheet.octopart.com:443/CC0603JRNPO9BN680-Yageo-Group-datasheet-188129580.pdf?src-supplier=LCSC, ComponentLink16Description=https://datasheet.octopart.com:443/CC0603JRNPO9BN680-Yageo-datasheet-137875056.pdf?src-supplier=Future+Electronics, ComponentLink16URL=https://datasheet.octopart.com:443/CC0603JRNPO9BN680-Yageo-datasheet-137875056.pdf?src-supplier=Future+Electronics, ComponentLink17Description=https://datasheet.octopart.com:443/CC0603JRNPO9BN680-Yageo-datasheet-136957424.pdf?src-supplier=Future+Electronics, ComponentLink17URL=https://datasheet.octopart.com:443/CC0603JRNPO9BN680-Yageo-datasheet-136957424.pdf?src-supplier=Future+Electronics, ComponentLink18Description=https://datasheet.octopart.com:443/CC0603JRNPO9BN680-Yageo-datasheet-137700082.pdf?src-supplier=Future+Electronics, ComponentLink18URL=https://datasheet.octopart.com:443/CC0603JRNPO9BN680-Yageo-datasheet-137700082.pdf?src-supplier=Future+Electronics, ComponentLink19Description=https://datasheet.octopart.com:443/CC0603JRNPO9BN680-Yageo-datasheet-62091628.pdf?src-supplier=Future+Electronics, ComponentLink19URL=https://datasheet.octopart.com:443/CC0603JRNPO9BN680-Yageo-datasheet-62091628.pdf?src-supplier=Future+Electronics, ComponentLink20Description=https://datasheet.octopart.com:443/CC0603JRNPO9BN680-Yageo-datasheet-24578986.pdf?src-supplier=Future+Electronics, ComponentLink20URL=https://datasheet.octopart.com:443/CC0603JRNPO9BN680-Yageo-datasheet-24578986.pdf?src-supplier=Future+Electronics, ComponentLink21Description=https://datasheet.octopart.com:443/CC0603JRNPO9BN680-Yageo-datasheet-16730043.pdf?src-supplier=Future+Electronics, ComponentLink21URL=https://datasheet.octopart.com:443/CC0603JRNPO9BN680-Yageo-datasheet-16730043.pdf?src-supplier=Future+Electronics, ComponentLink22Description=https://datasheet.octopart.com:443/CC0603JRNPO9BN680-Yageo-datasheet-15895757.pdf?src-supplier=Future+Electronics, ComponentLink22URL=https://datasheet.octopart.com:443/CC0603JRNPO9BN680-Yageo-datasheet-15895757.pdf?src-supplier=Future+Electronics, ComponentLink23Description=https://datasheet.octopart.com:443/CC0603JRNPO9BN680-Yageo-datasheet-12589826.pdf?src-supplier=Future+Electronics, ComponentLink23URL=https://datasheet.octopart.com:443/CC0603JRNPO9BN680-Yageo-datasheet-12589826.pdf?src-supplier=Future+Electronics, ComponentLink24Description=https://datasheet.octopart.com:443/CC0603JRNPO9BN680-Yageo-datasheet-8643175.pdf?src-supplier=SOS+electronic, ComponentLink24URL=https://datasheet.octopart.com:443/CC0603JRNPO9BN680-Yageo-datasheet-8643175.pdf?src-supplier=SOS+electronic, ComponentLink25Description=https://datasheet.octopart.com:443/CC0603JRNPO9BN680-Yageo-datasheet-8555986.pdf?src-supplier=TME, ComponentLink25URL=https://datasheet.octopart.com:443/CC0603JRNPO9BN680-Yageo-datasheet-8555986.pdf?src-supplier=TME, ComponentLink26Description=http://sigma.octopart.com:80/conflict_mineral_statement/Yageo-company-3.pdf?src-supplier=Compliance+Statements, ComponentLink26URL=http://sigma.octopart.com:80/conflict_mineral_statement/Yageo-company-3.pdf?src-supplier=Compliance+Statements, ComponentLink27Description=http://sigma.octopart.com:80/rohs_statement/Yageo-company-2.pdf?src-supplier=Compliance+Statements, ComponentLink27URL=http://sigma.octopart.com:80/rohs_statement/Yageo-company-2.pdf?src-supplier=Compliance+Statements, Composition=Ceramic, Country of Origin="Mainland China, Taiwan", Depth=800µm, Dissipation Factor=0.1%, Export Control Classification Number (ECCN) Code=EAR99, Halogen Free="Halogen Free", Harmonized Tariff Schedule (HTS) Code=8532.24.00.20, Height=800µm, Introduction Date=2009-04-16, Lead Free="Lead Free", Length=1.6mm, Lifecycle Status=Production, Manufacturer Part Number=CC0603JRNPO9BN680, Mounting Technology="Surface Mount", Number of Terminals=2, Pins=2, Pricing="1=0.112, 25=0.033, 100=0.028, 250=0.025, 500=0.021, 1000=0.019, 2500=0.017 (USD)", Radiation Hardening=No, REACH SVHC=Unaffected, RoHS=Compliant, Schedule B="8532240020, 8532240020|8532240020, 8532240020|8532240020|8532240020, 8532240020|8532240020|8532240020|8532240020", Stock=37, Supplier=Avnet, Supplier Part Number=CC0603JRNPO9BN680, Termination=SMD/SMT, Thickness=889µm, Voltage Rating=50V, Voltage Rating (AC)=50V, Voltage Rating (DC)=50V, Width=800µm
C45: library part CL10B105KB8NQNC, "MLCC - 0603 50 V X7R 1 uF 10 % Multilayer Ceramic Capacitor", Case/Package=0603, Dielectric Material=Ceramic, JLCPCB Part Number=C5199872, Manufacturer="Samsung Electro-Mechanics", Max Operating Temperature=125°C, Min Operating Temperature=-55°C, Tolerance=10%, Voltage Rating (DC)=50V, Category="Ceramic Capacitors", China RoHS=Compliant, ComponentLink1Description=https://datasheet.octopart.com:443/CL10B105KB8NQNC-Samsung-Electro-Mechanics-datasheet-182019892.pdf?src-supplier=IHS, ComponentLink1URL=https://datasheet.octopart.com:443/CL10B105KB8NQNC-Samsung-Electro-Mechanics-datasheet-182019892.pdf?src-supplier=IHS, ComponentLink2Description=https://datasheet.octopart.com:443/CL10B105KB8NQNC-Samsung-datasheet-8326407.pdf?src-supplier=TME, ComponentLink2URL=https://datasheet.octopart.com:443/CL10B105KB8NQNC-Samsung-datasheet-8326407.pdf?src-supplier=TME, ComponentLink3Description=https://datasheet.octopart.com:443/CL10B105KB8NQNC-Samsung-Electro-Mechanics-datasheet-168551976.pdf?src-supplier=Future+Electronics, ComponentLink3URL=https://datasheet.octopart.com:443/CL10B105KB8NQNC-Samsung-Electro-Mechanics-datasheet-168551976.pdf?src-supplier=Future+Electronics, Height=800µm, Length=1.6mm, Lifecycle Status=Production, Manufacturer Part Number=CL10B105KB8NQNC, Mounting Technology="Surface Mount", Number of Terminals=2, Pricing="4000=0.0293, 8000=0.0289, 16000=0.0284, 20000=0.0283, 60000=0.0274 (USD)", REACH SVHC=Unaffected, RoHS=Compliant, Stock=52000, Supplier="Future Electronics", Supplier Part Number=CL10B105KB8NQNC, Width=800µm
D1: "-55℃~+125℃ 3A 40V 500uA@40V 550mV@3A Independent SMA(DO-214AC) Schottky Diodes ROHS", JLCPCB Part Number=C8678, Manufacturer=MDD, Category="Schottky Diodes", Manufacturer Part Number=SS34
D2: "SMAJ Series 24.4 V 400 W Surface Mount Uni-Directional TVS Diode - DO-214AC", Breakdown Voltage=17.6V, Clamping Voltage=24.4V, Forward Voltage=3.5V, JLCPCB Part Number=C148216, Leakage Current=1µA, Manufacturer=Littelfuse, Max Breakdown Voltage=18.5V, Max Junction Temperature (Tj)=150°C, Max Power Dissipation=3.3W, Max Surge Current=16.4A, Min Breakdown Voltage=16.7V, Min Operating Temperature=-65°C, Operating Supply Voltage=15V, Peak Pulse Power=400W, Power Line Protection=No, Test Current=1mA, Category="TVS Diodes", ComponentLink1Description=https://datasheet.octopart.com:443/SMAJ15A-Littelfuse-datasheet-150463581.pdf?src-supplier=Farnell, ComponentLink1URL=https://datasheet.octopart.com:443/SMAJ15A-Littelfuse-datasheet-150463581.pdf?src-supplier=Farnell, ComponentLink2Description=https://datasheet.octopart.com:443/SMAJ15A-Littelfuse-datasheet-63710798.pdf?src-supplier=Farnell, ComponentLink2URL=https://datasheet.octopart.com:443/SMAJ15A-Littelfuse-datasheet-63710798.pdf?src-supplier=Farnell, ComponentLink3Description=https://datasheet.octopart.com:443/SMAJ15A-Littelfuse-datasheet-11547152.pdf?src-supplier=element14+APAC, ComponentLink3URL=https://datasheet.octopart.com:443/SMAJ15A-Littelfuse-datasheet-11547152.pdf?src-supplier=element14+APAC, ComponentLink4Description=https://datasheet.octopart.com:443/SMAJ15A-Littelfuse-datasheet-5393952.pdf?src-supplier=element14+APAC, ComponentLink4URL=https://datasheet.octopart.com:443/SMAJ15A-Littelfuse-datasheet-5393952.pdf?src-supplier=element14+APAC, ComponentLink5Description=https://datasheet.octopart.com:443/SMAJ15A-Littelfuse-datasheet-511791.pdf?src-supplier=element14+APAC, ComponentLink5URL=https://datasheet.octopart.com:443/SMAJ15A-Littelfuse-datasheet-511791.pdf?src-supplier=element14+APAC, ComponentLink6Description=https://datasheet.octopart.com:443/SMAJ15A-Littelfuse-datasheet-1053.pdf?src-supplier=DigiKey, ComponentLink6URL=https://datasheet.octopart.com:443/SMAJ15A-Littelfuse-datasheet-1053.pdf?src-supplier=DigiKey, ComponentLink7Description=https://datasheet.octopart.com:443/SMAJ15A-Littelfuse-datasheet-164649624.pdf?src-supplier=JRH+Electronics, ComponentLink7URL=https://datasheet.octopart.com:443/SMAJ15A-Littelfuse-datasheet-164649624.pdf?src-supplier=JRH+Electronics, ComponentLink8Description=https://datasheet.octopart.com:443/SMAJ15A-Littelfuse-datasheet-38878911.pdf?src-supplier=RS+(Formerly+Allied+Electronics), ComponentLink8URL=https://datasheet.octopart.com:443/SMAJ15A-Littelfuse-datasheet-38878911.pdf?src-supplier=RS+(Formerly+Allied+Electronics), ComponentLink9Description=https://datasheet.octopart.com:443/SMAJ15A-Littelfuse-datasheet-17901671.pdf?src-supplier=Future+Electronics, ComponentLink9URL=https://datasheet.octopart.com:443/SMAJ15A-Littelfuse-datasheet-17901671.pdf?src-supplier=Future+Electronics, Composition=Zener, Country of Origin="Mainland China", Direction=Unidirectional, Element Configuration=Single, Export Control Classification Number (ECCN) Code=EAR99, Harmonized Tariff Schedule (HTS) Code=8541.10.00.50, Height=2.29mm, Introduction Date=2003-11-20, Lead Free="Lead Free", Length=4.5mm, Lifecycle Status=Production, Manufacturer Part Number=SMAJ15A, Max Operating Temperature=150°C, Max Reverse Leakage Current=1µA, Mounting Technology="Surface Mount", Number of Channels=1, Number of Elements=1, Number of Terminals=2, Number of Unidirectional Channels=1, Packaging="Tape & Reel", Peak Pulse Current=16.4A, Peak Reverse Current=1µA, Pins=2, Polarity=Unidirectional, Power Dissipation=400W, Power Rating=400W, Pricing="5000=0.0662, 10000=0.0652, 15000=0.0646, 25000=0.0638, 50000=0.0622 (USD)", Radiation Hardening=No, REACH SVHC=Affected, Reverse Breakdown Voltage=16.7V, Reverse Standoff Voltage=15V, Reverse Voltage=15V, RoHS=Compliant, Schedule B="8541100080, 8541100080|8541100080|8541100080|8541100080|8541100080", Stock=635000, Supplier="Future Electronics", Supplier Part Number=SMAJ15A, Termination=SMD/SMT, Voltage Rating (DC)=15V, Width=2.79mm
D3: library part CMP-14399-000006-1, "DIODE ARRAY GP 100V 215MA SOT23", JLCPCB Part Number=C2500
D4: library part CMP-1674-00011-2, "LED RED CLEAR CHIP SMD", Case Code (Imperial)=0603, Case Code (Metric)=1608, Color=Red, Forward Current=30mA, Forward Voltage=2.4V, JLCPCB Part Number=C94869, Lens Color=Colorless, Max Operating Temperature=85°C, Min Operating Temperature=-55°C, Package Quantity=1, Power Dissipation=75mW, Reverse Voltage=5V, Test Current=20mA, Case/Package=0603, Depth=0.8mm, Dominant Wavelength=631nm, Height=0.8mm, Illumination Color=Red, Lead Free="Lead Free", Length=1.6mm, Lens Style=Diffused, Lens Transparency=Clear, Luminous Intensity=54mcd, Mount="Surface Mount", Number of Elements=1, Number of LEDs=1, Number of Pins=2, Packaging="Tape and Reel", Power Rating=75mW, Radiation Hardening=No, Viewing Angle=130°, Wavelength=639nm, Width=0.8mm
D5: library part CMP-1674-00008-9, "LED ORANGE CLEAR CHIP SMD", Case Code (Imperial)=0603, Case Code (Metric)=1608, Color=Orange, Forward Current=30mA, Forward Voltage=2V, JLCPCB Part Number=C157740, Lens Color=Colorless, Max Operating Temperature=85°C, Min Operating Temperature=-55°C, Package Quantity=3000, Power Dissipation=75mW, Reverse Voltage=5V, Test Current=20mA, Case/Package=0603, Depth=1.6mm, Dominant Wavelength=605nm, Height=0.9mm, Illumination Color=Orange, Lead Free="Lead Free", Length=3.2mm, Lens Size=0.8mm, Lens Style=Flat, Lens Transparency=Clear, Luminous Intensity=90mcd, Mount="Surface Mount", Number of Elements=1, Number of LEDs=1, Number of Pins=2, Packaging="Tape and Reel", Power Rating=75mW, Radiation Hardening=No, RoHS Compliant=Yes, Series=-, Viewing Angle=130°, Wavelength=611nm, Width=0.8mm
D6: library part CMP-2000-05197-2, "LED GREEN CLEAR CHIP SMD", Case Code (Imperial)=0603, Case Code (Metric)=1608, Color=Green, Forward Current=30mA, Forward Voltage=2V, JLCPCB Part Number=C125094, Lens Color=Colorless, Max Operating Temperature=85°C, Min Operating Temperature=-55°C, Package Quantity=1, Power Dissipation=75mW, Reverse Voltage=5V, Test Current=20mA, Case/Package=0603, Depth=0.8mm, Dominant Wavelength=571nm, Height=0.8mm, Illumination Color=Green, Lead Free="Lead Free", Length=1.6mm, Lens Style=Diffused, Lens Transparency=Clear, Luminous Intensity=35mcd, Mount="Surface Mount", Number of Elements=1, Number of LEDs=1, Number of Pins=2, Packaging="Tape and Reel", Power Rating=75mW, Radiation Hardening=No, Viewing Angle=130°, Wavelength=574nm, Width=0.8mm
J1 J2: "-40℃~+105℃ 0.5~1 1 18~24 1x2P 2 2P 3.5mm 300V 7A 8.5mm Green M2 Through Hole Plugin,P=3.5mm Screw Terminal Blocks ROHS", JLCPCB Part Number=C695629
L1: library part SWPA5040S220MT, "General Purpose Inductor, 22uH, 20%, 1 Element, Ferrite-Core, SMD, 2020", Case/Package=2020, DC Resistance (DCR)=168mΩ, JLCPCB Part Number=C68434, Manufacturer=Sunlord, Max Current Rating=1.5A, Max Operating Temperature=125°C, Min Operating Temperature=-40°C, Self Resonant Frequency=11MHz, Supplier Part Number=3442-SWPA5040S220MTCT-ND, Test Frequency=100kHz, Tolerance=20%, Category="Fixed Inductors", ComponentLink1Description=https://datasheet.octopart.com:443/SWPA5040S220MT-Sunlord-datasheet-180747130.pdf?src-supplier=IHS, ComponentLink1URL=https://datasheet.octopart.com:443/SWPA5040S220MT-Sunlord-datasheet-180747130.pdf?src-supplier=IHS, Core Material=Ferrite, Height=4mm, Length=5mm, Lifecycle Status=Production, Manufacturer Part Number=SWPA5040S220MT, Number of Circuits=1, Number of Terminals=2, Pricing="1=0.47, 10=0.384, 100=0.3156 (USD)", REACH SVHC=Unaffected, RoHS=Compliant, Shielding=Shielded, Stock=352, Supplier=DigiKey, Width=5mm
MD1: library part CMP-157412-000001-1, "TEENSY 4.1 (HEADERS)"
P1: library part CMP-1755-00006-1, "Male Header, Pitch 2.5 mm, 1 x 3 Position, Height 6.1 mm, Tail Length 3.4 mm, -25 to 85 degC, RoHS, Bulk", Case\Package=DIP, Frequency="1.8 MHz", Max Operating Temperature="70 degC", Max Ouput Current="-10 mA", Max Power Dissipation="1 W", Max Supply Voltage="15 V", Min Operating Temperature="0 degC", Min Supply Voltage="1 V", Nominal Supply Current="170 uA", Package Quantity=50, Channels=1, ComponentLink1Description="Manufacturer URL", ComponentLink1URL=http://www.jst.com/home2.html, ComponentLink2Description=Datasheet, ComponentLink2URL=http://www.jst-mfg.com/product/pdf/eng/eXH.pdf, DatasheetVersion=May-16, Height="4.57 mm", Length="9.81 mm", Mount="Through Hole", PackageDescription="Male Header, Pitch 2.5 mm, 1 x 3 Position, Height 6.1 mm, Tail Length 3.4 mm", PackageReference=S3B-XH-A(LF)(SN), Packaging=Rail/Tube, Pins=8, Radiation Hardening=No, REACH SVHC="No SVHC", RoHSCompliant=true, Weight="0.015535 oz", Width="6.35 mm"
P2: library part CMP-1502-01062-4, "THT Vertical Pin Header WR-PHD, Pitch 2.54 mm, Single Row, 3 pins", Color=Black, Contact Resistance=20mΩ, Current Rating=3A, Max Operating Temperature=105°C, Min Operating Temperature=-40°C, Operating Supply Voltage=250V, Connector Type="Male Pin", Contact Material=Gold, Contact Mating Length=5.9944mm, Contact Plating=Gold, Gender=Male, Height=8.94mm, Lead Free="Lead Free", Lead Pitch=2.54mm, Mount="Through Hole", Number of Contacts=3, Number of Pins=3, Number of Positions=3, Number of Rows=1, Orientation=Vertical, Packaging=Bulk, Pitch=2.54mm, RoHS=Compliant, Termination=Solder, Voltage Rating=250V
P3: library part CMP-1712-00002-7, "THT Vertical Pin Header WR-PHD, Pitch 2.54 mm, Single Row, 2 pins", Color=Black, Contact Resistance=20mΩ, Current Rating=3A, Max Operating Temperature=105°C, Min Operating Temperature=-40°C, Operating Supply Voltage=250V, Connector Type="Male Pin", Contact Gender=Male, Contact Material=Gold, Contact Mating Length=5.9944mm, Contact Plating=Gold, Gender=Male, Height=8.94mm, Housing Material=PBT, Lead Free="Lead Free", Lead Pitch=2.54mm, Mount="Through Hole", Number of Contacts=2, Number of Pins=2, Number of Positions=2, Number of Rows=1, Orientation=Vertical, Packaging=Bulk, Pitch=2.54mm, REACH SVHC=No, RoHS=Compliant, Termination="Through Hole", Voltage Rating=250V
Q1: library part "LSK170A SOT-23 3L ROHS", "Jfet N-ch 40V 10MA SOT23-3", Manufacturer="Linear Systems", Supplier Part Number=4004-LSK170ASOT-233LROHSCT-ND, Category=JFETs, Manufacturer Part Number="LSK170A SOT-23 3L ROHS", Pricing="1=12.45, 10=8.643, 50=7.0152, 100=6.8697 (USD)", Stock=12881, Supplier=DigiKey